# EAGLE board 50mm-LVDT-mitSchirm (EAGLE 5.12)
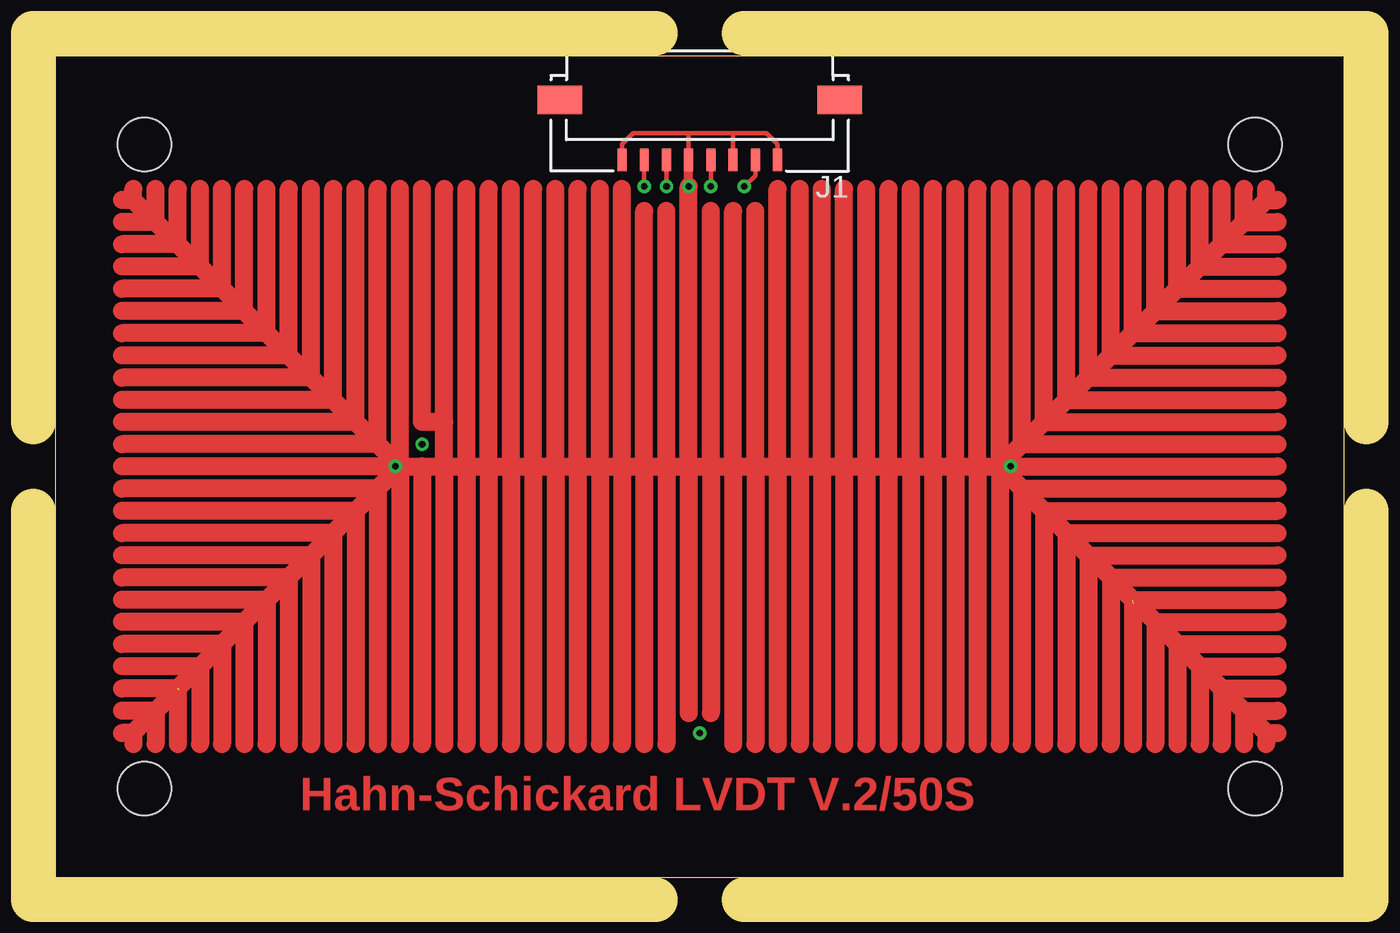
[diagram p0: board, top side]
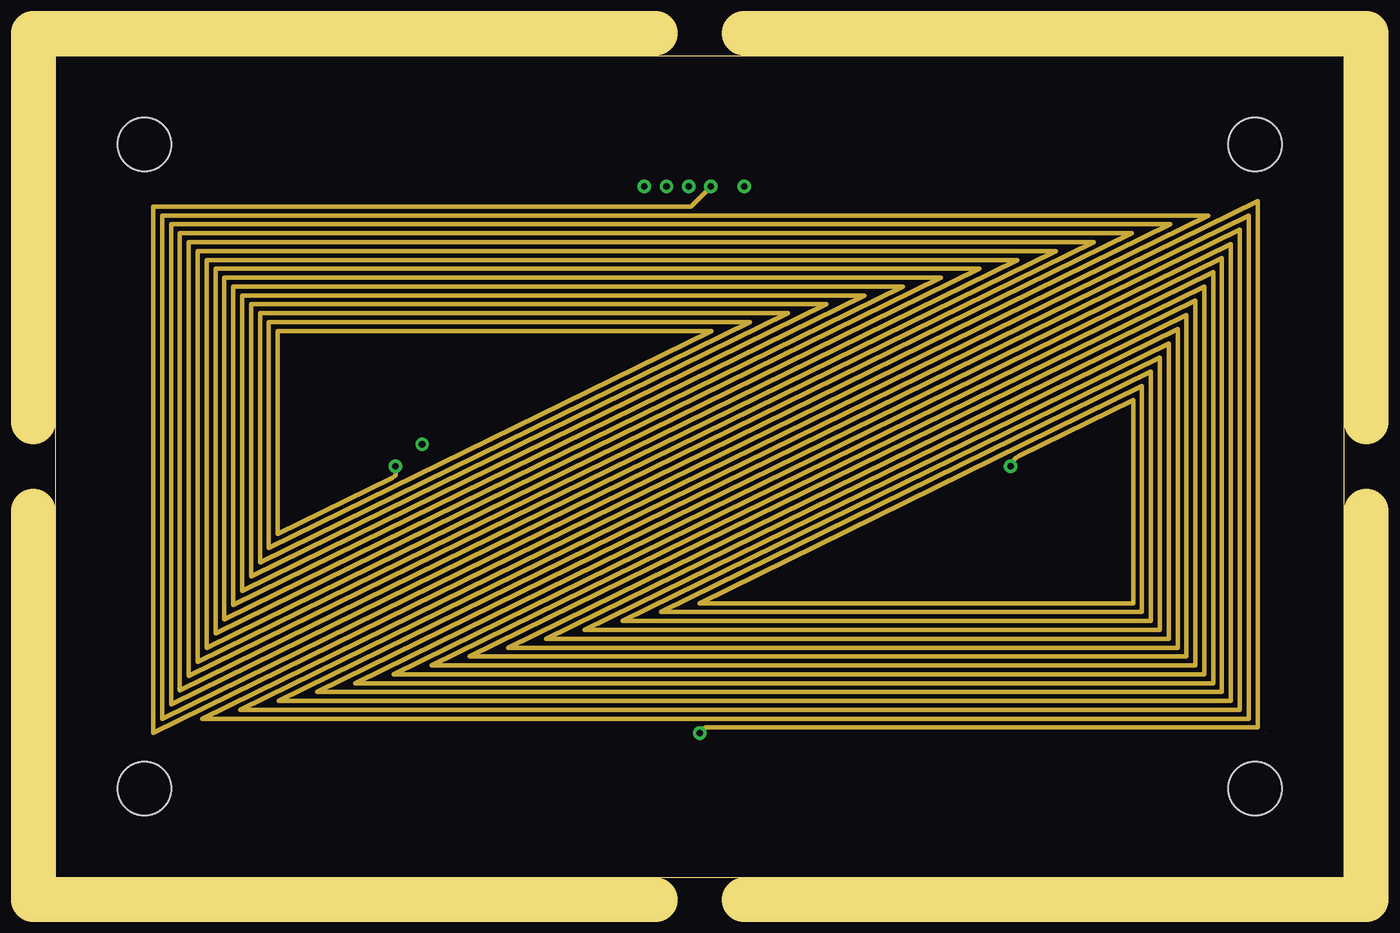
[diagram p1: board, inner layer Route2]
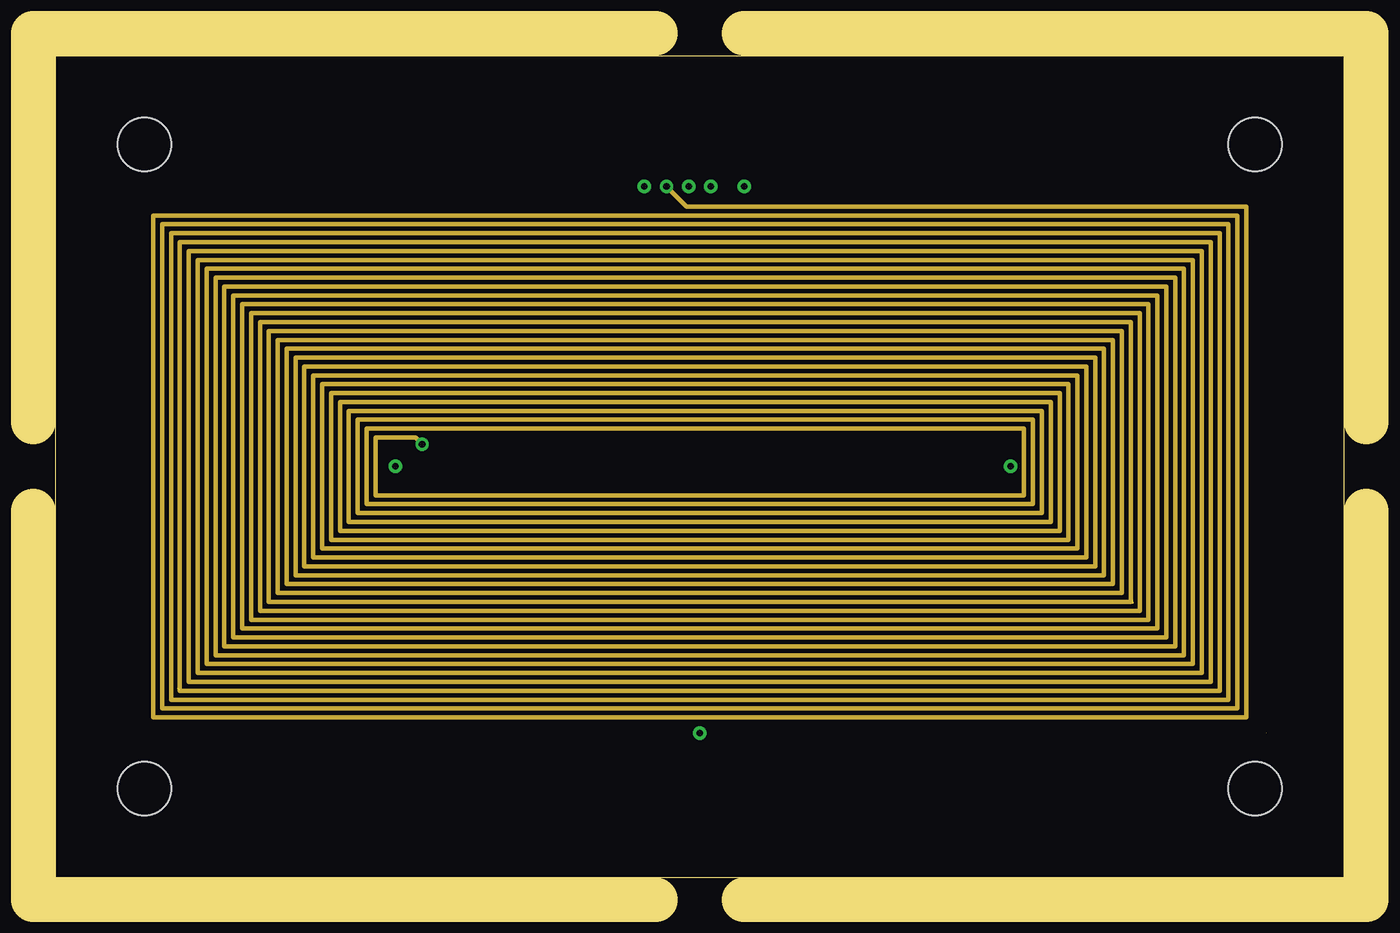
[diagram p2: board, inner layer Route15]
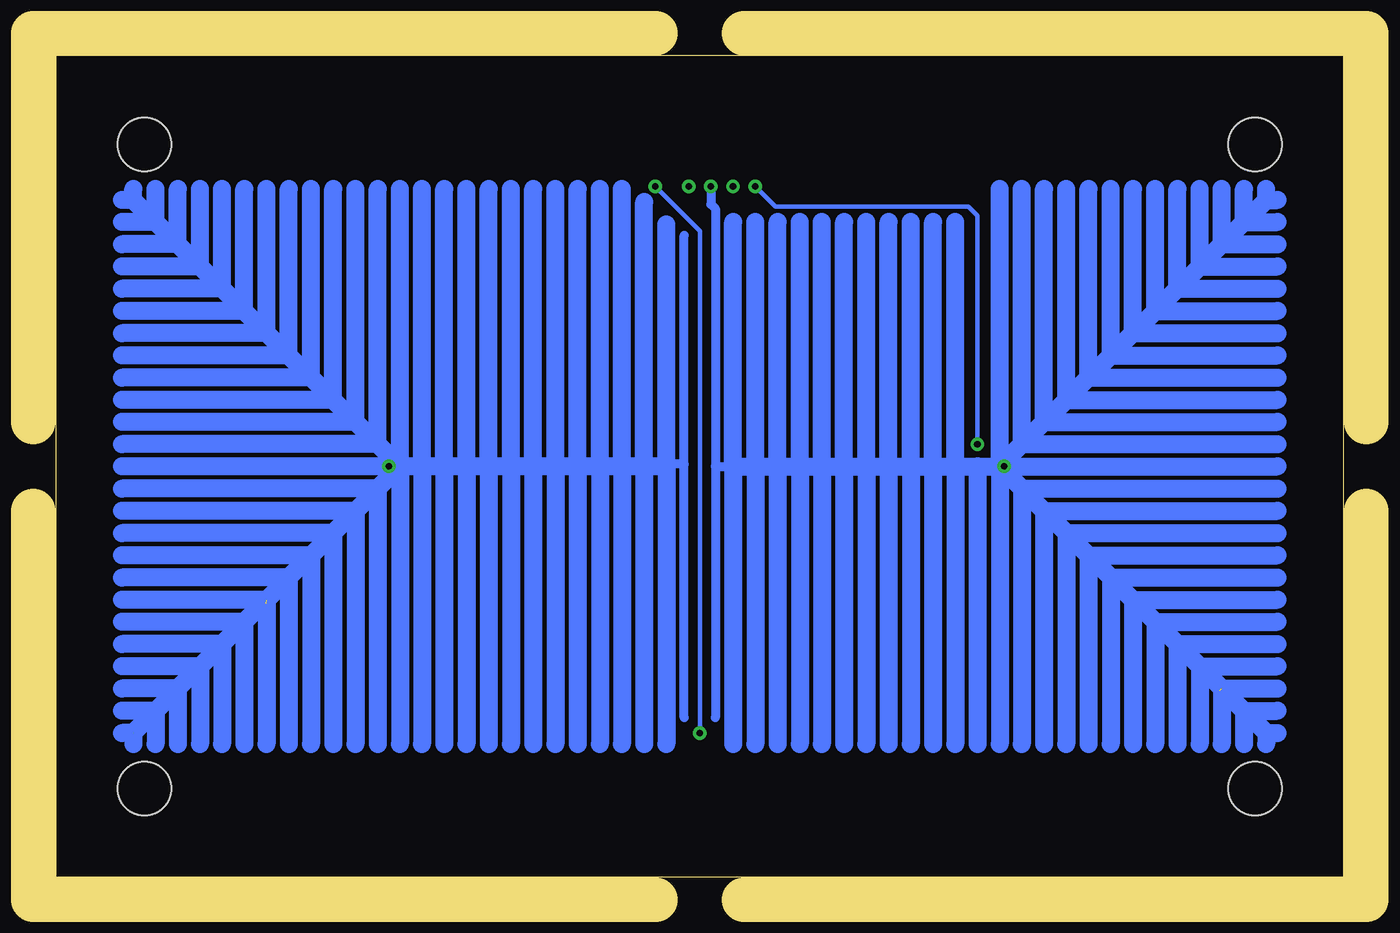
[diagram p3: board, bottom side, seen from below]

Size 58 x 37 mm. Coordinates in mm from the lower left corner, seen from the top.
Outline: 0,0 58,0 58,37 0,37 0,0
Copper layers (1*2+15*16): Top 0.035mm / dielectric 0.4mm / Route2 0.035mm / dielectric 0.6mm / Route15 0.035mm / dielectric 0.4mm / Bottom 0.035mm
Design rules "designRules-150mu_4layer *": minimum track width 0.15mm, minimum drill 0.2mm, track to track 0.15mm, track to pad 0.15mm, pad to pad 0.15mm, via to via 0.15mm, smd to smd 0.125mm, copper to edge 0.25mm, drill to drill 0.5mm, minimum pad ring 9mil, minimum via ring 0.15mm, stop-mask expansion 3mil, vias tented up to drill 0mil, thermal gap 12mil
Holes 2.4 mm at 54,4 54,33 4,33 4,4
Milling: 8 lines

## Footprints (pad centres in the part's own frame; a part is rotated, then mirrored left to right if it is on the bottom)
200529-0080 = smd 0.4 x 1: 1 -3.5,2.7; 2 -2.5,2.7; 3 -1.5,2.7; 4 -0.5,2.7; 5 0.5,2.7; 6 1.5,2.7; 7 2.5,2.7; 8 3.5,2.7 | smd 2 x 1.3: G1 -6.3,0; G2 6.3,0

## Placement (x,y rotation side)
J1  ZIF_200529-0080  [200529-0080]  29,35 180 top

## Library data of the parts
J1 = CON_FFC_FPC

## Nets
S$1: J1.7

## Tracks (layer width: path | path; a pad name or v marks a point on that pad's centre or on a via)
GND  (via drill 0.3)  (3 unrouted)
  Top 0.2: 25.5,32.5 25.5,33 26,33.5 28.5,33.5 | 28.5,33.5 30.5,33.5 | 30.5,33.5 32,33.5 32.5,33 32.5,32.3 | 28.5,32.3 28.5,33.5 | 30.5,33.5 30.5,32.3 | v31,31.1 31.5,31.6 31.5,32.3
  Top 0.4: v28.5,31.1 28.5,32.3
  Top 0.8: 47.5,23.5 47.5,31 | 47.5,23.5 55,23.5 | 48.5,24.5 48.5,31 | 48.5,24.5 55,24.5 | 49.5,25.5 49.5,31 | 49.5,25.5 55,25.5 | 50.5,26.5 50.5,31 | 50.5,26.5 55,26.5 | 51.5,27.5 51.5,31 | 51.5,27.5 55,27.5 | 52.5,28.5 52.5,31 | 52.5,28.5 55,28.5 | 53.5,29.5 55,29.5 | 53.5,29.5 53.5,31 | 44.5,16.5 44.5,6 | 43.5,19.5 43.5,31 | 44.5,16.5 55,16.5 | 43.5,17.5 43.5,6 | 53.5,29.5 54.5,30.5 | 54.5,30.5 54.5,31 | 54.5,30.5 55,30.5 | 43.5,17.5 55,17.5 | 43.5,19.5 55,19.5 | 42.5,18.5 42.5,6 | 42.5,18.5 42.5,31 | 42.5,18.5 55,18.5 | 41.5,18.5 41.5,6 | 41.5,18.5 42.5,18.5 | 41.5,18.5 41.5,31 | 40.5,18.5 40.5,6 | 40.5,18.5 40.5,31 | 40.5,18.5 41.5,18.5 | 39.5,18.5 39.5,6 | 39.5,18.5 40.5,18.5 | 39.5,18.5 39.5,31 | 38.5,18.5 38.5,6 | 38.5,18.5 38.5,31 | 38.5,18.5 39.5,18.5 | 37.5,18.5 37.5,6 | 37.5,18.5 38.5,18.5 | 37.5,18.5 37.5,31 | 36.5,18.5 36.5,6 | 36.5,18.5 36.5,31 | 36.5,18.5 37.5,18.5 | 35.5,18.5 35.5,6 | 35.5,18.5 36.5,18.5 | 35.5,18.5 35.5,31 | 34.5,18.5 34.5,6 | 34.5,18.5 34.5,31 | 34.5,18.5 35.5,18.5 | 33.5,18.5 33.5,6 | 33.5,18.5 34.5,18.5 | 33.5,18.5 33.5,31 | 32.5,18.5 32.5,6 | 32.5,18.5 32.5,31 | 32.5,18.5 33.5,18.5 | 31.5,18.5 31.5,6 | 31.5,18.5 32.5,18.5 | 31.5,18.5 31.5,30 | 30.5,18.5 30.5,6 | 30.5,18.5 30.5,30 | 30.5,18.5 31.5,18.5 | 29.5,18.5 29.5,7.4 | 29.5,18.5 30.5,18.5 | 29.5,18.5 29.5,30 | 28.5,18.5 28.5,7.4 | 28.5,18.5 v28.5,31.1 | 28.5,18.5 29.5,18.5 | 27.5,18.5 27.5,6 | 27.5,18.5 28.5,18.5 | 27.5,18.5 27.5,30 | 3.5,30.5 3.5,31 | 3.5,30.5 3,30.5 | 4.5,29.5 3.5,30.5 | 4.5,29.5 4.5,31 | 4.5,29.5 3,29.5 | 26.5,18.5 26.5,6 | 26.5,18.5 27.5,18.5 | 26.5,18.5 26.5,30 | 25.5,18.5 25.5,6 | 25.5,18.5 26.5,18.5 | 25.5,18.5 25.5,31 | 5.5,28.5 4.5,29.5 | 5.5,28.5 5.5,31 | 5.5,28.5 3,28.5 | 7.5,10.5 7.5,6 | 7.5,10.5 3,10.5 | 8.5,11.5 8.5,6 | 6.5,27.5 5.5,28.5
  Top 0.8: 6.5,27.5 6.5,31 | 6.5,27.5 3,27.5 | 24.5,18.5 24.5,6 | 24.5,18.5 24.5,31 | 24.5,18.5 25.5,18.5 | 23.5,18.5 23.5,6 | 23.5,18.5 24.5,18.5 | 23.5,18.5 23.5,31 | 7.5,26.5 6.5,27.5 | 7.5,26.5 7.5,31 | 7.5,26.5 3,26.5 | 8.5,11.5 3,11.5 | 9.5,12.5 9.5,6 | 9.5,12.5 3,12.5 | 10.5,13.5 10.5,6 | 8.5,25.5 7.5,26.5 | 8.5,25.5 8.5,31 | 8.5,25.5 3,25.5 | 22.5,18.5 22.5,6 | 22.5,18.5 22.5,31 | 22.5,18.5 23.5,18.5 | 21.5,18.5 21.5,6 | 21.5,18.5 22.5,18.5 | 21.5,18.5 21.5,31 | 9.5,24.5 8.5,25.5 | 9.5,24.5 9.5,31 | 9.5,24.5 3,24.5 | 10.5,13.5 3,13.5 | 11.5,14.5 11.5,6 | 11.5,14.5 3,14.5 | 12.5,15.5 12.5,6 | 10.5,23.5 9.5,24.5 | 10.5,23.5 10.5,31 | 10.5,23.5 3,23.5 | 20.5,18.5 20.5,6 | 20.5,18.5 20.5,31 | 20.5,18.5 21.5,18.5 | 19.5,18.5 19.5,6 | 19.5,18.5 20.5,18.5 | 19.5,18.5 19.5,31 | 11.5,22.5 10.5,23.5 | 11.5,22.5 11.5,31 | 11.5,22.5 3,22.5 | 12.5,15.5 3,15.5 | 13.5,16.5 13.5,6 | 13.5,16.5 3,16.5 | 14.5,17.5 14.5,6 | 12.5,21.5 11.5,22.5 | 12.5,21.5 12.5,31 | 12.5,21.5 3,21.5 | 18.5,18.5 18.5,6 | 18.5,18.5 18.5,31 | 18.5,18.5 19.5,18.5 | 17.5,18.5 17.5,6 | 17.5,18.5 18.5,18.5 | 17.5,18.5 17.5,20.5 | 17.5,20.5 17.5,31 | 13.5,20.5 12.5,21.5 | 13.5,20.5 13.5,31 | 13.5,20.5 3,20.5 | 14.5,17.5 3,17.5 | 14.5,19.5 13.5,20.5 | 14.5,19.5 14.5,31 | 14.5,19.5 3,19.5 | 16.5,18.5 16.5,6 | 16.5,18.5 17.5,18.5 | 15.5,18.5 15.5,6 | 15.5,18.5 16.5,18.5 | 15.5,18.5 14.5,19.5 | 15.5,18.5 15.5,31 | 15.5,18.5 3,18.5 | 6.5,9.5 6.5,6 | 3.5,6.5 3,6.5 | 3.5,6.5 3.5,6 | 6.5,9.5 3,9.5 | 5.5,8.5 5.5,6 | 5.5,8.5 3,8.5 | 4.5,7.5 3.5,6.5 | 4.5,7.5 4.5,6 | 4.5,7.5 3,7.5 | 54.5,6.5 55,6.5 | 54.5,6.5 54.5,6 | 53.5,7.5 53.5,6 | 53.5,7.5 54.5,6.5 | 53.5,7.5 55,7.5 | 52.5,8.5 52.5,6 | 52.5,8.5 55,8.5 | 51.5,9.5 51.5,6 | 51.5,9.5 55,9.5 | 50.5,10.5 50.5,6 | 50.5,10.5 55,10.5 | 49.5,11.5 49.5,6 | 49.5,11.5 55,11.5
  Top 0.8: 48.5,12.5 48.5,6 | 48.5,12.5 55,12.5 | 47.5,13.5 47.5,6 | 47.5,13.5 55,13.5 | 46.5,14.5 46.5,6 | 46.5,14.5 55,14.5 | 45.5,15.5 55,15.5 | 45.5,15.5 45.5,6 | 46.5,22.5 46.5,31 | 46.5,22.5 55,22.5 | 45.5,21.5 45.5,31 | 45.5,21.5 55,21.5 | 44.5,20.5 55,20.5 | 44.5,20.5 44.5,31 | 4.5,7.5 5.5,8.5 | 5.5,8.5 6.5,9.5 | 6.5,9.5 7.5,10.5 | 7.5,10.5 8.5,11.5 | 8.5,11.5 9.5,12.5 | 9.5,12.5 10.5,13.5 | 10.5,13.5 11.5,14.5 | 11.5,14.5 12.5,15.5 | 12.5,15.5 13.5,16.5 | 13.5,16.5 14.5,17.5 | 14.5,17.5 15.5,18.5 | 52.5,8.5 53.5,7.5 | 51.5,9.5 52.5,8.5 | 50.5,10.5 51.5,9.5 | 49.5,11.5 50.5,10.5 | 48.5,12.5 49.5,11.5 | 47.5,13.5 48.5,12.5 | 46.5,14.5 47.5,13.5 | 45.5,15.5 46.5,14.5 | 44.5,16.5 45.5,15.5 | 43.5,17.5 44.5,16.5 | 42.5,18.5 43.5,17.5 | 42.5,18.5 43.5,19.5 | 43.5,19.5 44.5,20.5 | 44.5,20.5 45.5,21.5 | 45.5,21.5 46.5,22.5 | 46.5,22.5 47.5,23.5 | 47.5,23.5 48.5,24.5 | 48.5,24.5 49.5,25.5 | 49.5,25.5 50.5,26.5 | 50.5,26.5 51.5,27.5 | 51.5,27.5 52.5,28.5 | 52.5,28.5 53.5,29.5 | 17.5,20.5 16.5,20.5 16.5,31
  Route2 0.2: v43,18.5 43,18.64 43.26,18.9 43.37,18.96 48.51,21.49 48.51,12.34 28.98,12.34 48.91,22.12 48.91,11.94 27.26,11.94 49.31,22.76 49.31,11.54 25.53,11.54 49.71,23.4 49.71,11.14 23.81,11.14 50.11,24.04 50.11,10.74 22.09,10.74 50.51,24.68 50.51,10.34 20.37,10.34 50.91,25.32 50.91,9.94 18.65,9.94 51.31,25.96 51.31,9.54 16.93,9.54 51.71,26.6 51.71,9.14 15.21,9.14 52.11,27.24 52.11,8.74 13.49,8.74 52.51,27.88 52.51,8.34 11.77,8.34 52.91,28.52 52.91,7.94 10.05,7.94 53.31,29.16 53.31,7.54 8.32,7.54 53.71,29.8 53.71,7.14 6.61,7.14 54.11,30.44 54.11,6.74 29.25,6.74 v29,6.49 | v15.3,18.5 15.3,18.09 15.25,18.04 15.14,17.98 10,15.45 10,24.6 29.53,24.6 9.6,14.82 9.6,25 31.25,25 9.2,14.18 9.2,25.4 32.98,25.4 8.8,13.54 8.8,25.8 34.7,25.8 8.4,12.9 8.4,26.2 36.42,26.2 8,12.26 8,26.6 38.14,26.6 7.6,11.62 7.6,27 39.86,27 7.2,10.98 7.2,27.4 41.58,27.4 6.8,10.34 6.8,27.8 43.3,27.8 6.4,9.7 6.4,28.2 45.02,28.2 6,9.06 6,28.6 46.74,28.6 5.6,8.42 5.6,29 48.46,29 5.2,7.78 5.2,29.4 50.19,29.4 4.8,7.14 4.8,29.8 51.9,29.8 4.4,6.5 4.4,30.2 28.6,30.2 29.5,31.1
  Bottom 0.2: v29,6.49 29,29.1 v31,31.1
  Bottom 0.4: 28.3,18.5 27.5,18.5 | 28.3,18.5 28.3,30.1 28.5,30.3 v28.5,31.1 | 28.3,18.5 28.3,7.2 | 29.7,18.6 30.5,18.6 | 29.7,7.2 29.7,18.6 | 29.7,18.6 29.7,28.9
  Bottom 0.6: v15.3,18.5 15.2,18.5 | v43,18.5 42.8,18.5
  Bottom 0.8: 47.5,23.5 47.5,31 | 47.5,23.5 55,23.5 | 48.5,24.5 48.5,31 | 48.5,24.5 55,24.5 | 49.5,25.5 49.5,31 | 49.5,25.5 55,25.5 | 50.5,26.5 50.5,31 | 50.5,26.5 55,26.5 | 51.5,27.5 51.5,31 | 51.5,27.5 55,27.5 | 52.5,28.5 52.5,31 | 52.5,28.5 55,28.5 | 53.5,29.5 55,29.5 | 53.5,29.5 53.5,31 | 44.5,16.5 44.5,6 | 43.5,19.5 43.5,31 | 44.5,16.5 55,16.5 | 43.5,17.5 43.5,6 | 53.5,29.5 54.5,30.5 | 54.5,30.5 54.5,31 | 54.5,30.5 55,30.5 | 43.5,17.5 55,17.5 | 43.5,19.5 55,19.5 | 42.5,18.5 42.5,6 | 42.5,18.5 42.5,31 | 42.5,18.5 55,18.5 | 41.5,18.5 41.5,6 | 41.5,18.5 42.5,18.5 | 41.5,18.5 41.5,31 | 40.5,18.5 40.5,6 | 40.5,18.5 40.5,31 | 40.5,18.5 41.5,18.5 | 39.5,18.5 39.5,6 | 39.5,18.5 40.5,18.5 | 39.5,18.5 39.5,31 | 38.5,18.5 38.5,6 | 38.5,18.5 38.5,31 | 38.5,18.5 39.5,18.5 | 37.5,18.5 37.5,6 | 37.5,18.5 38.5,18.5 | 37.5,18.5 37.5,31 | 36.5,18.5 36.5,6 | 36.5,18.5 36.5,31 | 36.5,18.5 37.5,18.5 | 35.5,18.5 35.5,6 | 35.5,18.5 36.5,18.5 | 35.5,18.5 35.5,31 | 34.5,18.5 34.5,6 | 34.5,18.5 34.5,31 | 34.5,18.5 35.5,18.5 | 33.5,18.5 33.5,6 | 33.5,18.5 34.5,18.5 | 33.5,18.5 33.5,31 | 32.5,18.5 32.5,6 | 32.5,18.5 32.5,31 | 32.5,18.5 33.5,18.5 | 31.5,18.5 31.5,6 | 31.5,18.5 32.5,18.5 | 31.5,18.5 31.5,30.4 | 30.5,18.5 30.5,6 | 30.5,18.5 30.5,18.6 30.5,29.4 | 30.5,18.5 31.5,18.5 | 27.5,18.5 27.5,6 | 27.5,18.5 27.5,29.5 | 3.5,30.5 3.5,31 | 3.5,30.5 3,30.5 | 4.5,29.5 3.5,30.5 | 4.5,29.5 4.5,31 | 4.5,29.5 3,29.5 | 26.5,18.5 26.5,6 | 26.5,18.5 26.5,29.5 | 25.5,18.5 25.5,6 | 26.5,18.5 25.5,18.5 | 25.5,18.5 25.5,29.5 | 5.5,28.5 4.5,29.5 | 5.5,28.5 5.5,31 | 5.5,28.5 3,28.5 | 7.5,10.5 7.5,6 | 7.5,10.5 3,10.5 | 8.5,11.5 8.5,6 | 6.5,27.5 5.5,28.5 | 6.5,27.5 6.5,31 | 6.5,27.5 3,27.5 | 24.5,18.5 24.5,6 | 24.5,18.5 24.5,29.5 | 25.5,18.5 24.5,18.5 | 23.5,18.5 23.5,6 | 24.5,18.5 23.5,18.5
  Bottom 0.8: 23.5,18.5 23.5,29.5 | 7.5,26.5 6.5,27.5 | 7.5,26.5 7.5,31 | 7.5,26.5 3,26.5 | 8.5,11.5 3,11.5 | 9.5,12.5 9.5,6 | 9.5,12.5 3,12.5 | 10.5,13.5 10.5,6 | 8.5,25.5 7.5,26.5 | 8.5,25.5 8.5,31 | 8.5,25.5 3,25.5 | 22.5,18.5 22.5,6 | 22.5,18.5 22.5,29.5 | 23.5,18.5 22.5,18.5 | 21.5,18.5 21.5,6 | 22.5,18.5 21.5,18.5 | 21.5,18.5 21.5,29.5 | 9.5,24.5 8.5,25.5 | 9.5,24.5 9.5,31 | 9.5,24.5 3,24.5 | 10.5,13.5 3,13.5 | 11.5,14.5 11.5,6 | 11.5,14.5 3,14.5 | 12.5,15.5 12.5,6 | 10.5,23.5 9.5,24.5 | 10.5,23.5 10.5,31 | 10.5,23.5 3,23.5 | 20.5,18.5 20.5,6 | 20.5,18.5 20.5,29.5 | 21.5,18.5 20.5,18.5 | 19.5,18.5 19.5,6 | 20.5,18.5 19.5,18.5 | 19.5,18.5 19.5,29.5 | 11.5,22.5 10.5,23.5 | 11.5,22.5 11.5,31 | 11.5,22.5 3,22.5 | 12.5,15.5 3,15.5 | 13.5,16.5 13.5,6 | 13.5,16.5 3,16.5 | 14.5,17.5 14.5,6 | 12.5,21.5 11.5,22.5 | 12.5,21.5 12.5,31 | 12.5,21.5 3,21.5 | 18.5,18.5 18.5,6 | 18.5,18.5 18.5,29.5 | 19.5,18.5 18.5,18.5 | 17.5,18.5 17.5,6 | 18.5,18.5 17.5,18.5 | 17.5,18.5 17.5,29.5 | 13.5,20.5 12.5,21.5 | 13.5,20.5 13.5,31 | 13.5,20.5 3,20.5 | 14.5,17.5 3,17.5 | 14.5,19.5 13.5,20.5 | 14.5,19.5 14.5,31 | 14.5,19.5 3,19.5 | 16.5,18.5 16.5,6 | 17.5,18.5 16.5,18.5 | 15.5,18.5 15.5,6 | 16.5,18.5 15.5,18.5 | 15.5,18.5 14.5,19.5 | 15.5,18.5 15.5,31 | 15.5,18.5 3,18.5 | 6.5,9.5 6.5,6 | 3.5,6.5 3,6.5 | 3.5,6.5 3.5,6 | 6.5,9.5 3,9.5 | 5.5,8.5 5.5,6 | 5.5,8.5 3,8.5 | 4.5,7.5 3.5,6.5 | 4.5,7.5 4.5,6 | 4.5,7.5 3,7.5 | 54.5,6.5 55,6.5 | 54.5,6.5 54.5,6 | 53.5,7.5 53.5,6 | 53.5,7.5 54.5,6.5 | 53.5,7.5 55,7.5 | 52.5,8.5 52.5,6 | 52.5,8.5 55,8.5 | 51.5,9.5 51.5,6 | 51.5,9.5 55,9.5 | 50.5,10.5 50.5,6 | 50.5,10.5 55,10.5 | 49.5,11.5 49.5,6 | 49.5,11.5 55,11.5 | 48.5,12.5 48.5,6 | 48.5,12.5 55,12.5 | 47.5,13.5 47.5,6 | 47.5,13.5 55,13.5 | 46.5,14.5 46.5,6 | 46.5,14.5 55,14.5 | 45.5,15.5 55,15.5
  Bottom 0.8: 45.5,15.5 45.5,6 | 46.5,22.5 46.5,31 | 46.5,22.5 55,22.5 | 45.5,21.5 45.5,31 | 45.5,21.5 55,21.5 | 44.5,20.5 55,20.5 | 44.5,20.5 44.5,31 | 5.5,8.5 4.5,7.5 | 6.5,9.5 5.5,8.5 | 7.5,10.5 6.5,9.5 | 8.5,11.5 7.5,10.5 | 9.5,12.5 8.5,11.5 | 10.5,13.5 9.5,12.5 | 11.5,14.5 10.5,13.5 | 12.5,15.5 11.5,14.5 | 13.5,16.5 12.5,15.5 | 14.5,17.5 13.5,16.5 | 15.5,18.5 14.5,17.5 | 52.5,8.5 53.5,7.5 | 51.5,9.5 52.5,8.5 | 50.5,10.5 51.5,9.5 | 49.5,11.5 50.5,10.5 | 48.5,12.5 49.5,11.5 | 47.5,13.5 48.5,12.5 | 46.5,14.5 47.5,13.5 | 45.5,15.5 46.5,14.5 | 44.5,16.5 45.5,15.5 | 43.5,17.5 44.5,16.5 | 42.5,18.5 43.5,17.5 | 42.5,18.5 43.5,19.5 | 43.5,19.5 44.5,20.5 | 44.5,20.5 45.5,21.5 | 45.5,21.5 46.5,22.5 | 46.5,22.5 47.5,23.5 | 47.5,23.5 48.5,24.5 | 48.5,24.5 49.5,25.5 | 49.5,25.5 50.5,26.5 | 50.5,26.5 51.5,27.5 | 51.5,27.5 52.5,28.5 | 52.5,28.5 53.5,29.5 | 27.5,18.5 26.5,18.5
S$1  (via drill 0.3)
  Top 0.2: v26.5,31.1 J1.7 | v27.5,31.1 27.5,32.3
  Route15 0.2: v16.5,19.5 16.2,19.8 14.4,19.8 14.4,17.2 43.6,17.2 43.6,20.2 14,20.2 14,16.8 44,16.8 44,20.6 13.6,20.6 13.6,16.4 44.4,16.4 44.4,21 13.2,21 13.2,16 44.8,16 44.8,21.4 12.8,21.4 12.8,15.6 45.2,15.6 45.2,21.8 12.4,21.8 12.4,15.2 45.6,15.2 45.6,22.2 12,22.2 12,14.8 46,14.8 46,22.6 11.6,22.6 11.6,14.4 46.4,14.4 46.4,23 11.2,23 11.2,14 46.8,14 46.8,23.4 10.8,23.4 10.8,13.6 47.2,13.6 47.2,23.8 10.4,23.8 10.4,13.2 47.6,13.2 47.6,24.2 10,24.2 10,12.8 48,12.8 48,24.6 9.6,24.6 9.6,12.4 48.4,12.4 48.4,25 9.2,25 9.2,12 48.8,12 48.8,25.4 8.8,25.4 8.8,11.6 49.2,11.6 49.2,25.8 8.4,25.8 8.4,11.2 49.6,11.2 49.6,26.2 8,26.2 8,10.8 50,10.8 50,26.6 7.6,26.6 7.6,10.4 50.4,10.4 50.4,27 7.2,27 7.2,10 50.8,10 50.8,27.4 6.8,27.4 6.8,9.6 51.2,9.6 51.2,27.8 6.4,27.8 6.4,9.2 51.6,9.2 51.6,28.2 6,28.2 6,8.8 52,8.8 52,28.6 5.6,28.6 5.6,8.4 52.4,8.4 52.4,29 5.2,29 5.2,8 52.8,8 52.8,29.4 4.8,29.4 4.8,7.6 53.2,7.6 53.2,29.8 4.4,29.8 4.4,7.2 53.6,7.2 53.6,30.2 28.4,30.2 v27.5,31.1
  Bottom 0.2: v26.5,31.1 25.6,30.2 16.9,30.2 16.5,29.8 v16.5,19.5
S$3  (via drill 0.3)
  Top 0.2: v29.5,31.1 29.5,32.3

## Text on the board
Top: Hahn-Schickard LVDT V.2/50S